# EAGLE board rtu (EAGLE 9.3.0)
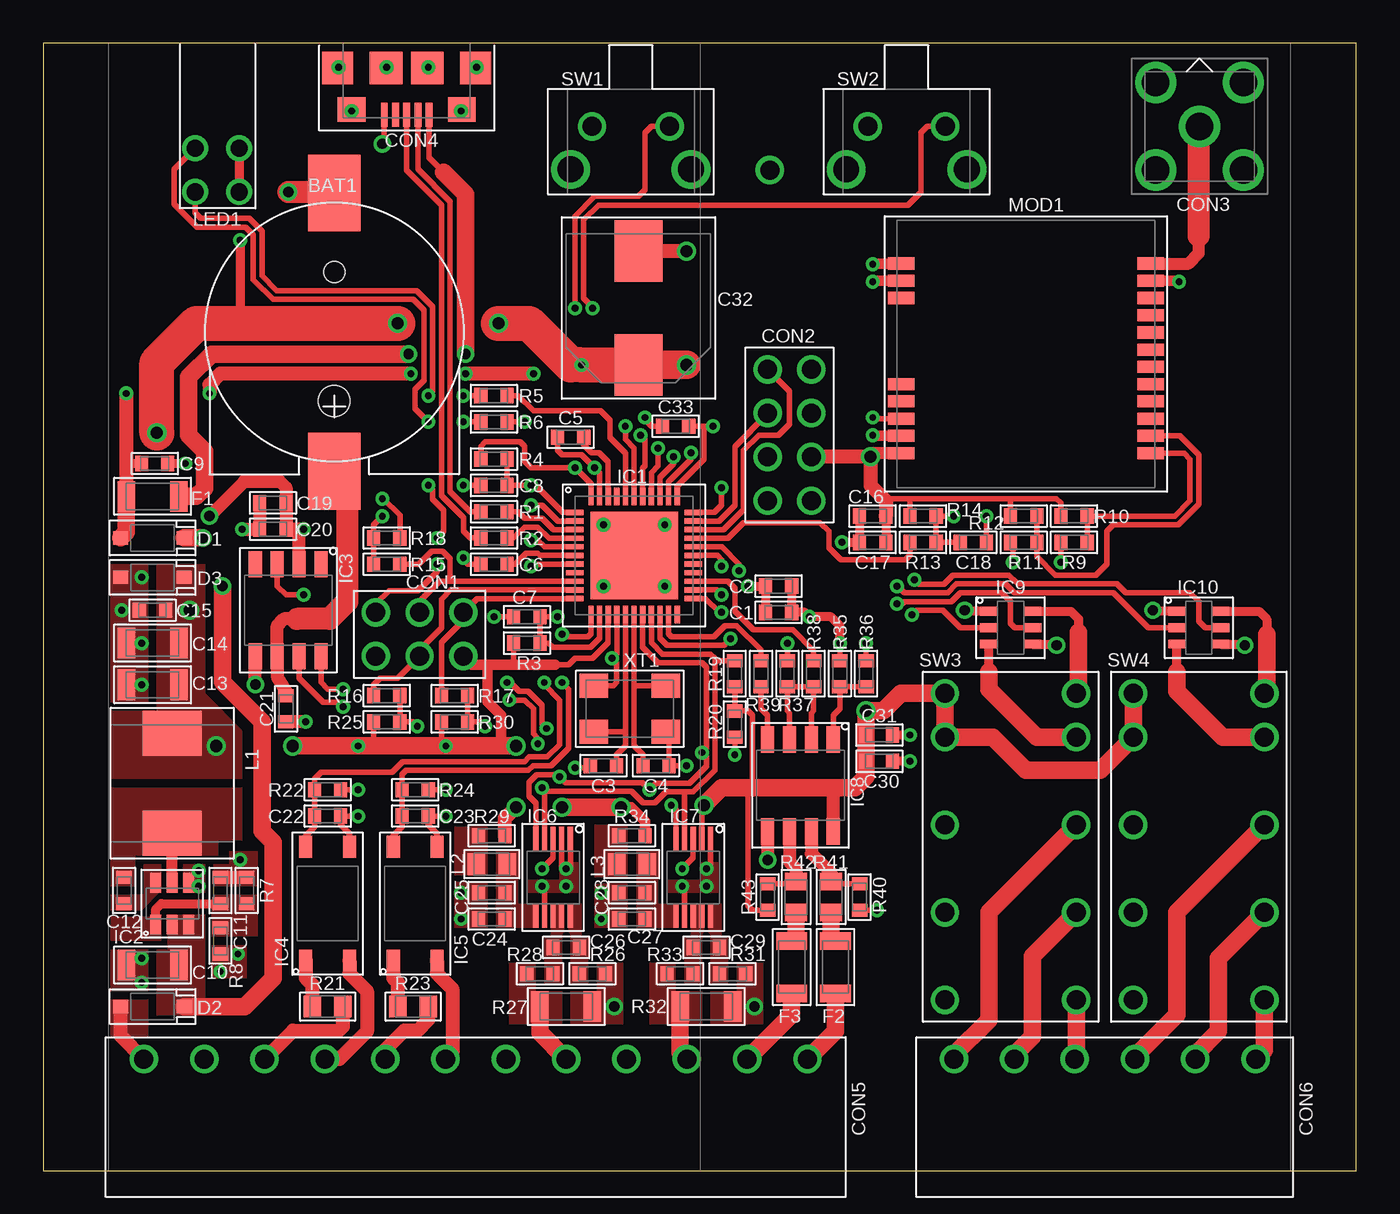
[diagram p0: board, top side]
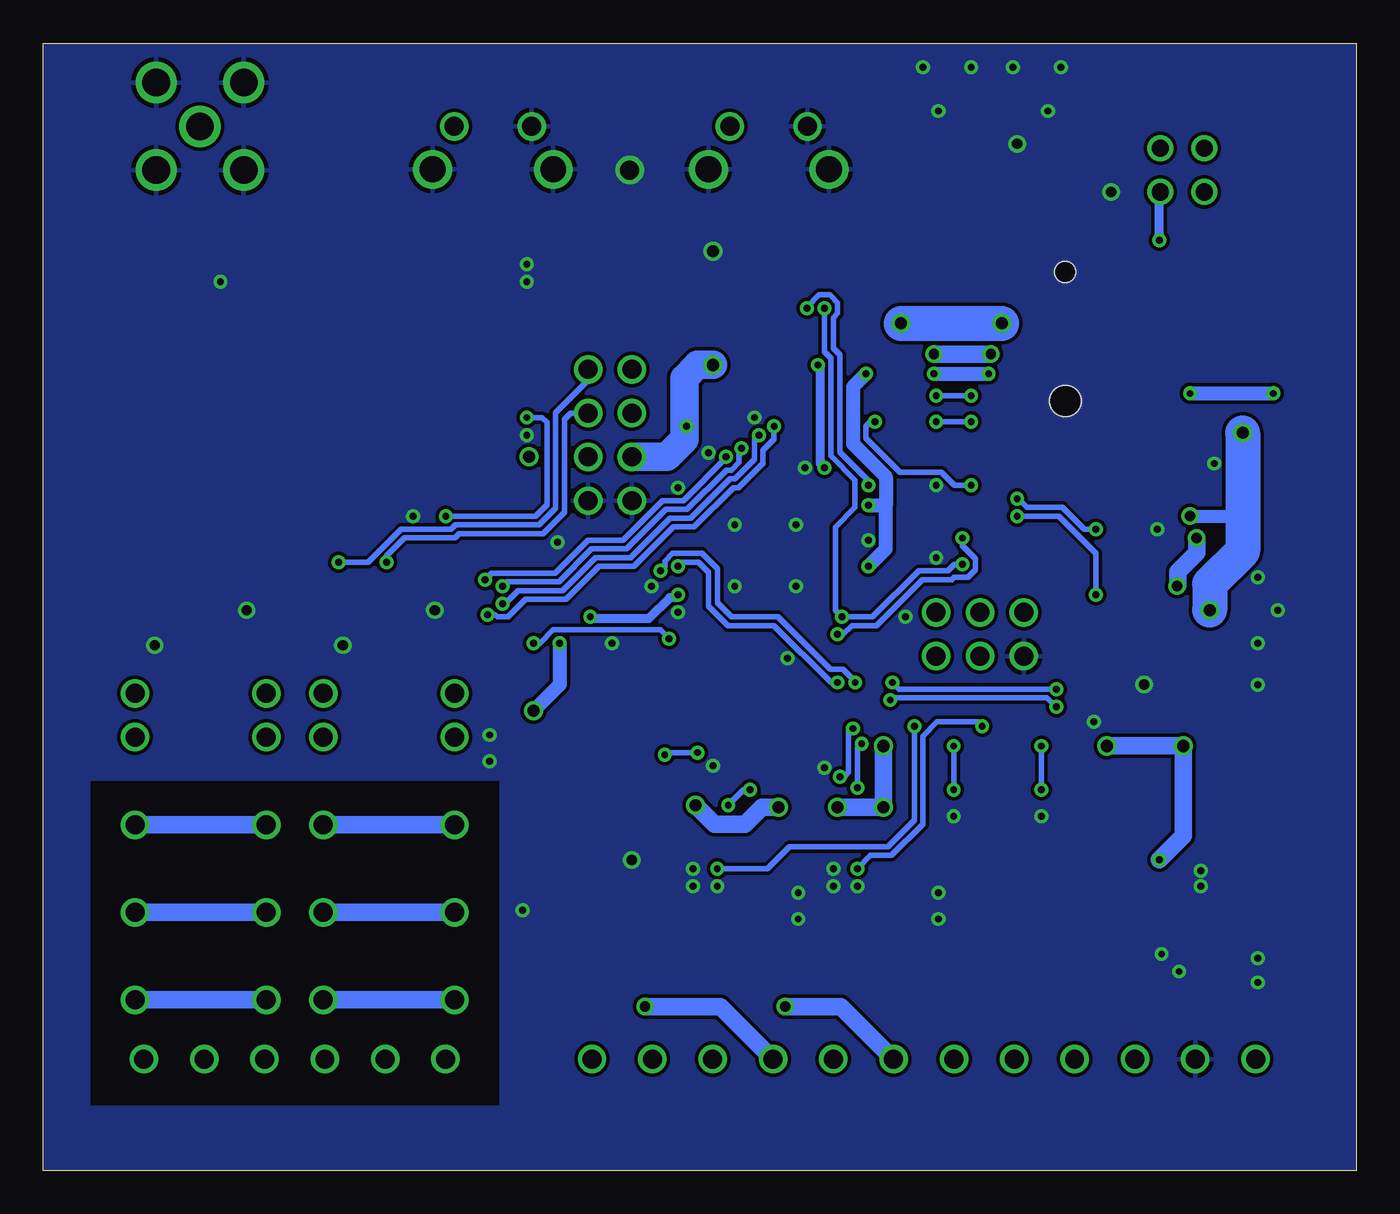
[diagram p1: board, bottom side, seen from below]

Size 76.2 x 65.41 mm. Coordinates in mm from the lower left corner, seen from the top.
Outline: 0,0 76.2,0 76.2,65.41 0,65.41 0,0
Copper layers (1*16): Top 0.035mm / dielectric 1.5mm / Bottom 0.035mm
Design rules "myparts *": minimum track width 12mil, minimum drill 0.4mm, track to track 8mil, track to pad 8mil, pad to pad 8mil, via to via 8mil, smd to smd 0mil, copper to edge 0mil, drill to drill 6mil, minimum pad ring 10mil, minimum via ring 8mil, stop-mask expansion 4mil, vias tented up to drill 28mil, thermal gap 10mil
Holes 1.8 mm at 16.89,44.64
Holes 1.2 mm at 16.89,52.13

## Footprints (pad centres in the part's own frame; a part is rotated, then mirrored left to right if it is on the bottom)
BAT-1220-BC501SM = smd 4.445 x 3.048: + 8.065,0; - -8.065,0
0603 = smd 0.762 x 0.889: 1 -0.762,0; 2 0.762,0
1206 = smd 1.016 x 1.778: 1 -1.524,0; 2 1.524,0
CAPACITOR-SMD-8 = smd 2.794 x 3.556: 1 0,3.302; 2 0,-3.302
ISP = drill 1.1 pad 1.65: 1 0,0; 2 2.54,0; 3 0,-2.54; 4 2.54,-2.54; 5 0,-5.08; 6 2.54,-5.08
HEADER-8P-2R-DIP-2_54MM = drill 1.1 pad 1.65: 1 0,0; 2 2.54,0; 3 5.08,0; 4 7.62,0; 5 0,2.54; 6 2.54,2.54; 7 5.08,2.54; 8 7.62,2.54
SMA-RF = drill 1.6: 1 0,0; 2 -2.54,2.54; 3 -2.54,-2.54; 4 2.54,-2.54; 5 2.54,2.54
USB-MICRO-B-SMD = smd 0.4 x 1.4: 1 -1.3,4.15; 2 -0.65,4.15; 3 0,4.15; 4 0.65,4.15; 5 1.3,4.15 | smd 1.6 x 1.4: 6 -3.2,3.85; 7 3.2,3.85 | smd 1.8 x 1.9: 8 -4,1.45; 11 4,1.45 | smd 1.9 x 1.9: 9 -1.2,1.45; 10 1.2,1.45
KF2EDGR-3.5-12P = drill 1.1: 1 19.25,0; 2 15.75,0; 3 12.25,0; 4 8.75,0; 5 5.25,0; 6 1.75,0; 7 -1.75,0; 8 -5.25,0; 9 -8.75,0; 10 -12.25,0; 11 -15.75,0; 12 -19.25,0
KF2EDGR-3.5-6P = drill 1.1: 1 8.75,0; 2 5.25,0; 3 1.75,0; 4 -1.75,0; 5 -5.25,0; 6 -8.75,0
SOD123-DIODE = smd 0.889 x 0.762: 1 -1.841,0; 2 1.841,0
QFN-44 = smd 1.016 x 0.305: 1 -3.429,2.5; 2 -3.429,2; 3 -3.429,1.5; 4 -3.429,1; 5 -3.429,0.5; 6 -3.429,0; 7 -3.429,-0.5; 8 -3.429,-1; 9 -3.429,-1.5; 10 -3.429,-2; 11 -3.429,-2.5; 23 3.429,-2.5; 24 3.429,-2; 25 3.429,-1.5; 26 3.429,-1; 27 3.429,-0.5; 28 3.429,0; 29 3.429,0.5; 30 3.429,1; 31 3.429,1.5; 32 3.429,2; 33 3.429,2.5 | smd 0.305 x 1.016: 12 -2.5,-3.429; 13 -2,-3.429; 14 -1.5,-3.429; 15 -1,-3.429; 16 -0.5,-3.429; 17 0,-3.429; 18 0.5,-3.429; 19 1,-3.429; 20 1.5,-3.429; 21 2,-3.429; 22 2.5,-3.429; 34 2.5,3.429; 35 2,3.429; 36 1.5,3.429; 37 1,3.429; 38 0.5,3.429; 39 0,3.429; 40 -0.5,3.429; 41 -1,3.429; 42 -1.5,3.429; 43 -2,3.429; 44 -2.5,3.429 | smd 5.08 x 5.08: 45 0,0
SOT23-6 = smd 1.143 x 0.635: 1 -1.206,0.95; 2 -1.206,0; 3 -1.206,-0.95; 4 1.206,-0.95; 5 1.206,0; 6 1.206,0.95
SOIC-8 = smd 1.524 x 0.762: 1 -2.667,1.905; 2 -2.667,0.635; 3 -2.667,-0.635; 4 -2.667,-1.905; 5 2.667,-1.905; 6 2.667,-0.635; 7 2.667,0.635; 8 2.667,1.905
OPTO-SMD = smd 1.27 x 0.762: 1 -3.3,1.27; 2 -3.3,-1.27; 3 3.3,-1.27; 4 3.3,1.27
VSSOP-10 = smd 1.397 x 0.3: 1 -2.223,1; 2 -2.223,0.5; 3 -2.223,0; 4 -2.223,-0.5; 5 -2.223,-1; 6 2.223,-1; 7 2.223,-0.5; 8 2.223,0; 9 2.223,0.5; 10 2.223,1
SC74-6 = smd 1.016 x 0.508: 1 -1.27,0.95; 2 -1.27,0; 3 -1.27,-0.95; 4 1.27,-0.95; 5 1.27,0; 6 1.27,0.95
INDUCTOR-0520-0630 = smd 2.6 x 3.4: 1 -2.9,0; 2 2.9,0
0805 = smd 1.016 x 1.27: 1 -0.889,0; 2 0.889,0
LED-HOLDER-2P = drill 1: 1 1.27,6.096; 2 -1.27,6.096; 3 1.27,8.636; 4 -1.27,8.636
RAK4200 = smd 1.524 x 0.7: 1 -7.239,5.75; 2 -7.239,4.75; 3 -7.239,3.75; 4 -7.239,2.75; 5 -7.239,1.75; 6 -7.239,0.75; 7 -7.239,-0.25; 8 -7.239,-1.25; 9 -7.239,-2.25; 10 -7.239,-3.25; 11 -7.239,-4.25; 12 -7.239,-5.25; 13 7.239,-5.25; 14 7.239,-4.25; 15 7.239,-3.25; 16 7.239,1.75; 17 7.239,2.75; 18 7.239,3.75; 19 7.239,4.75; 20 7.239,5.75
B3F-3150-52-55 = drill 1.1: 1 -2.25,0; 2 2.25,0 | drill 1.5: 3 -3.5,2.5; 4 3.5,2.5
HFD2-L2 = drill 1.1: C1 -3.81,1.27; C2 3.81,1.27; L1+ -3.81,8.89; L1- 3.81,8.89; L2+ -3.81,6.35; L2- 3.81,6.35; NC1 -3.81,-3.81; NC2 3.81,-3.81; NO1 -3.81,-8.89; NO2 3.81,-8.89
CRYSTAL-5032-4P = smd 1.651 x 1.397: 1 -2.095,-1.333; 2 2.095,-1.333; 3 2.095,1.333; 4 -2.095,1.333

## Placement (x,y rotation side)
BAT1  [BAT-1220-BC501SM]  16.89,48.64 270 top
C1  [0603]  42.67,32.38 0 top
C2  [0603]  42.67,33.91 0 top
C3  [0603]  32.51,23.5 0 top
C4  [0603]  35.56,23.5 180 top
C5  [0603]  30.61,42.55 0 top
C6  [0603]  26.16,35.18 0 top
C7  [0603]  28.07,32.13 0 top
C8  [0603]  26.16,39.75 180 top
C9  [0603]  6.48,41.02 180 top
C10  [1206]  6.35,11.94 0 top
C11  [0603]  10.29,16.26 90 top
C12  [0603]  4.7,16.26 270 top
C13  [1206]  6.35,28.19 0 top
C14  [1206]  6.35,30.61 0 top
C15  [0603]  6.35,32.51 0 top
C16  [0603]  48.13,37.97 0 top
C17  [0603]  48.13,36.45 0 top
C18  [0603]  53.98,36.45 180 top
C19  [0603]  13.34,38.73 0 top
C20  [0603]  13.34,37.21 0 top
C21  [0603]  14.1,26.8 90 top
C22  [0603]  16.51,20.57 180 top
C23  [0603]  21.59,20.57 180 top
C24  [0603]  26.04,14.61 0 top
C25  [0603]  26.04,16.13 0 top
C26  [0603]  30.35,12.95 0 top
C27  [0603]  34.16,14.61 0 top
C28  [0603]  34.16,16.13 0 top
C29  [0603]  38.48,12.95 0 top
C30  [0603]  48.51,23.75 180 top
C31  [0603]  48.51,25.27 180 top
C32  [CAPACITOR-SMD-8]  34.54,50.04 0 top
C33  [0603]  36.7,43.18 0 top
CON1  [ISP]  24.38,32.38 270 top
CON2  [HEADER-8P-2R-DIP-2_54MM]  42.04,46.48 270 top
CON3  [SMA-RF]  67.1,60.58 0 top
CON4  [USB-MICRO-B-SMD]  21.1,65.41 180 top
CON5  [KF2EDGR-3.5-12P]  25.1,6.48 0 top
CON6  [KF2EDGR-3.5-6P]  61.6,6.48 0 top
D1  [SOD123-DIODE]  6.35,36.7 180 top
D2  [SOD123-DIODE]  6.35,9.53 180 top
D3  [SOD123-DIODE]  6.35,34.42 180 top
F1  [1206]  6.35,39.12 180 top
F2  [1206]  45.97,11.81 90 top
F3  [1206]  43.43,11.81 90 top
IC1  [QFN-44]  34.29,35.69 0 top
IC2  [SOT23-6]  7.49,15.49 90 top
IC3  [SOIC-8]  14.22,32.51 270 top
IC4  [OPTO-SMD]  16.51,15.49 90 top
IC5  [OPTO-SMD]  21.59,15.49 90 top
IC6  [VSSOP-10]  29.59,17.02 270 top
IC7  [VSSOP-10]  37.72,17.02 270 top
IC8  [SOIC-8]  43.94,22.35 270 top
IC9  [SC74-6]  56.13,31.5 0 top
IC10  [SC74-6]  67.06,31.5 0 top
L1  [INDUCTOR-0520-0630]  7.49,22.48 270 top
L2  [0805]  26.04,17.78 0 top
L3  [0805]  34.16,17.78 0 top
LED1  [LED-HOLDER-2P]  10.1,65.41 180 top
MOD1  [RAK4200]  57.02,47.37 180 top
R1  [0603]  26.16,38.23 0 top
R2  [0603]  26.16,36.7 0 top
R3  [0603]  28.07,30.61 0 top
R4  [0603]  26.16,41.27 180 top
R5  [0603]  26.16,44.96 180 top
R6  [0603]  26.16,43.43 180 top
R7  [0603]  11.81,16.26 270 top
R8  [0603]  10.29,13.34 90 top
R9  [0603]  59.82,36.45 0 top
R10  [0603]  59.82,37.97 180 top
R11  [0603]  56.9,36.45 0 top
R12  [0603]  56.9,37.97 180 top
R13  [0603]  51.05,36.45 180 top
R14  [0603]  51.05,37.97 180 top
R15  [0603]  19.94,35.18 0 top
R16  [0603]  19.94,27.56 180 top
R17  [0603]  23.88,27.56 180 top
R18  [0603]  19.94,36.7 180 top
R19  [0603]  40.13,28.83 90 top
R20  [0603]  40.13,25.91 270 top
R21  [0805]  16.51,9.53 180 top
R22  [0603]  16.51,22.1 180 top
R23  [0805]  21.46,9.53 180 top
R24  [0603]  21.59,22.1 180 top
R25  [0603]  19.94,26.04 0 top
R26  [0603]  31.88,11.43 0 top
R27  [1206]  30.35,9.53 0 top
R28  [0603]  28.83,11.43 180 top
R29  [0603]  26.04,19.43 180 top
R30  [0603]  23.88,26.04 0 top
R31  [0603]  40.01,11.43 180 top
R32  [1206]  38.48,9.53 180 top
R33  [0603]  36.96,11.43 0 top
R34  [0603]  34.16,19.43 180 top
R35  [0603]  46.23,28.83 270 top
R36  [0603]  47.75,28.83 270 top
R37  [0603]  43.18,28.83 270 top
R38  [0603]  44.7,28.83 270 top
R39  [0603]  41.66,28.83 270 top
R40  [0603]  47.37,15.88 90 top
R41  [0805]  45.72,15.88 90 top
R42  [0805]  43.69,15.88 90 top
R43  [0603]  42.04,15.88 90 top
SW1  [B3F-3150-52-55]  34.1,60.58 180 top
SW2  [B3F-3150-52-55]  50.1,60.58 180 top
SW3  [HFD2-L2]  56.13,18.8 0 top
SW4  [HFD2-L2]  67.06,18.8 0 top
XT1  [CRYSTAL-5032-4P]  34.04,26.8 0 top

## Library data of the parts
BAT1 C1-C33 CON1-CON6 D1-D3 F1-F3 IC1-IC10 L1-L3 LED1 MOD1 R1-R43 SW1-SW4 XT1 = myparts

## Nets
GND: BAT1.- C1.1 C2.1 C3.1 C4.1 C5.1 C6.1 C7.1 C8.2 C9.1 C10.1 C13.1 C14.1 C15.1 C16.1 C17.1 C18.1 C19.1 C20.1 C21.1 C22.1 C23.1 C24.1 C25.1 C27.1 C28.1 C30.1 C31.1 C32.1 C33.1 CON1.6 CON2.4 CON2.8 CON3.2 CON3.3 CON3.4 CON3.5 CON4.5 CON4.6 CON4.7 CON4.8 CON4.9 CON4.10 CON4.11 CON5.11 D3.2 IC1.5 IC1.15 IC1.23 IC1.33 IC1.35 IC1.43 IC1.45 IC2.4 IC3.5 IC4.3 IC5.3 IC6.1 IC6.2 IC6.7 IC7.1 IC7.7 IC8.5 IC9.1 IC9.4 IC10.1 IC10.4 MOD1.11 MOD1.13 MOD1.14 MOD1.19 R8.1 R37.1 R40.1 SW1.2 SW1.3 SW1.4 SW2.2 SW2.3 SW2.4 XT1.2 XT1.4
N$1: IC1.40 R5.1
N$2: C18.2 MOD1.18 R13.1 R14.1
N$3: CON1.1 IC1.11 R17.2
N$4: CON3.1 MOD1.12
N$5: CON2.2 IC1.32
N$6: MOD1.1 R9.2 R10.1
N$7: MOD1.2 R11.2 R12.1
N$8: LED1.1 R6.2
N$9: CON1.4 IC1.10 R16.2
N$10: C3.2 IC1.16 XT1.1
N$11: CON2.1 IC1.31
N$12: C4.2 IC1.17 XT1.3
N$13: C16.2 C17.2 CON2.7 MOD1.20 R10.2 R12.2 R14.2
N$14: CON2.5 R9.1
N$15: LED1.3 R5.2
N$16: CON2.6 R11.1
N$17: C29.1 IC7.8 IC7.9 R33.2
N$18: CON4.2 R1.1
N$19: CON4.3 R2.1
N$20: IC4.1 R21.2
N$21: C29.2 IC7.10 R31.2
N$22: IC1.30 R13.2
N$23: IC6.3 R16.1 R25.2
N$24: IC1.36 IC10.5
N$25: IC7.3 R17.1 R30.2
N$26: IC9.6 SW3.L1-
N$27: L3.1 R34.2
N$28: IC9.3 SW3.L2-
N$29: C8.1 IC1.1 R4.1 SW2.1
N$30: CON5.4 R31.1 R32.1
N$31: C5.2 IC1.42
N$32: C23.2 IC1.28 IC5.4 R24.2
N$33: IC5.1 R23.2
N$34: C6.2 IC1.6
N$35: C22.2 IC1.29 IC4.4 R22.2
N$36: IC1.12 R6.1
N$38: IC1.37 IC10.2
N$39: CON6.1 SW4.NO1 SW4.NO2
N$40: CON5.3 R32.2 R33.1
N$41: C7.2 CON1.5 IC1.13 R3.2 SW1.1
N$42: C27.2 C28.2 IC7.6 L3.2
N$43: IC1.3 R1.2
N$44: IC1.4 R2.2
N$45: CON1.3 IC1.9 R15.2
N$46: CON5.2 F3.1
N$47: IC8.1 R35.2 R36.2
N$48: IC8.4 R39.2
N$49: CON5.7 IC5.2
N$50: CON5.9 IC4.2
N$51: IC8.7 R40.2 R41.2
N$52: IC8.6 R42.2 R43.2
N$53: IC8.2 IC8.3 R37.2 R38.2
N$54: F3.2 R42.1
N$55: CON5.8 R23.1
N$56: CON4.1 F1.1
N$57: C10.2 D1.1 D2.1 IC2.2 IC2.3
N$58: BAT1.+ C21.2 IC3.6
N$59: CON5.6 R26.2 R27.2
N$60: CON5.1 F2.1
N$61: IC1.20 R36.1
N$62: IC1.21 R39.1
N$63: IC1.25 R38.1
N$64: IC10.6 SW4.L1-
N$65: C12.2 IC2.6
N$66: C12.1 IC2.5 L1.2
N$67: CON6.2 SW4.NC1 SW4.NC2
N$68: C26.2 IC6.10 R26.1
N$69: C26.1 IC6.8 IC6.9 R28.1
N$70: IC3.3 R15.1 R18.2
N$71: L2.1 R29.2
N$72: C11.1 IC2.1 R7.2 R8.2
N$73: IC1.18 IC3.8 IC6.5 IC7.5 R20.2
N$74: CON6.3 SW4.C1 SW4.C2
N$77: C24.2 C25.2 IC6.6 L2.2
N$79: IC1.19 IC3.7 IC6.4 IC7.4 R19.2
N$80: F2.2 R41.1
N$81: CON5.5 R27.1 R28.2
N$82: IC10.3 SW4.L2-
N$85: CON5.10 R21.1
N$86: CON6.4 SW3.NO1 SW3.NO2
N$87: CON6.5 SW3.NC1 SW3.NC2
N$88: CON6.6 SW3.C1 SW3.C2
N$90: IC1.38 IC9.5
N$91: IC1.39 IC9.2
UVCC: C9.2 D1.2 F1.2 IC1.2 IC1.7
VCC: C1.2 C2.2 C11.2 C13.2 C14.2 C15.2 C19.2 C20.2 C30.2 C31.2 C32.2 C33.2 CON1.2 CON2.3 D3.1 IC1.14 IC1.24 IC1.34 IC1.44 IC3.2 IC7.2 IC8.8 L1.1 LED1.2 LED1.4 R3.1 R4.2 R7.1 R18.1 R19.1 R20.1 R22.1 R24.1 R25.1 R29.1 R30.1 R34.1 R35.1 R43.1 SW3.L1+ SW3.L2+ SW4.L1+ SW4.L2+
VEXT: CON5.12 D2.2

## Tracks (layer width: path | path; a pad name or v marks a point on that pad's centre or on a via)
GND  (via drill 0.4, 0.6, 0.7, 1.1)
  Top 0.305: C3.1 31.62,23.37 v30.86,23.37 | v37.34,23.5 C4.1 36.32,25.27 XT1.2 | v43.18,30.61 R37.1 | IC1.23 38.44,33.19 39.24,32.38 v39.37,32.38 | IC1.15 33.29,29.99 v33.02,29.72 33.28,29.46 33.28,28.33 33.08,28.13 XT1.4 | v26.16,32.13 C7.1 | IC1.33 38.95,38.19 39.37,38.61 v39.37,39.62 | IC1.5 29.09,36.19 28.7,36.58 v28.32,36.58 | C6.1 24.64,35.18 24.38,35.43 v24.38,35.56 | IC1.43 32.29,40.48 v32,40.77 31.25,41.53 30.1,41.53 29.84,41.78 C5.1 | v24.38,39.75 C8.2 | CON4.5 19.8,59.68 v19.68,59.56 | C18.1 v54.74,37.97 | v48.39,15.11 R40.1 | v17.14,64.01 v17.14,64 CON4.11 | v19.94,64.01 19.9,63.97 CON4.10 | v22.35,64.01 CON4.9 | v25.15,64.01 25.1,63.96 CON4.8 | v17.91,61.47 v17.9,61.48 CON4.7 | v24.26,61.47 24.3,61.51 CON4.6 | IC6.7 29.09,16.51 v28.96,16.51 | IC6.2 30.09,17.53 v30.35,17.53 30.59,17.53 IC6.1 | IC7.7 37.22,16.38 v37.08,16.51 | IC7.1 38.72,17.76 v38.48,17.53 | v18.29,20.57 C22.1 17.27,20.07 17.78,19.56 IC4.3 | IC5.3 22.86,19.56 22.35,20.07 C23.1 v23.37,20.57 | C33.1 35.31,43.18 34.92,43.56 v34.92,43.69 | IC1.45 32.51,35.69 v32.51,37.47 | IC1.45 34.29,37.47 v36.07,37.47 | IC1.45 36.07,35.69 v36.07,33.91 | IC1.45 34.29,33.91 v32.51,33.91 | IC1.35 36.29,39.97 37.59,41.27 v37.59,41.66
  Top 0.508: C16.1 C17.1 v46.35,36.45 | C1.1 C2.1 v40.89,33.91 | v50.29,25.27 C31.1 | v8.26,41.02 C9.1 | v50.29,23.75 C30.1 | IC9.1 53.53,32.45 v53.47,32.51 | IC9.4 58.73,30.55 v58.8,30.48 | IC10.1 64.45,32.45 v64.39,32.51 | IC10.4 69.66,30.55 v69.72,30.48
  Top 0.61: MOD1.13 48.18,52.62 v48.13,52.58 | MOD1.14 48.19,51.62 v48.13,51.56 | MOD1.19 48.18,42.62 v48.13,42.67 | MOD1.11 65.85,51.62 v65.91,51.56
  Top 0.762: IC8.5 v42.04,18.03 | C19.1 C20.1 v11.56,37.21 | v15.24,26.04 C21.1 | v12.32,28.19 IC3.5
  Top 0.813: v37.34,53.34 C32.1
  Top 1.27: BAT1.- 16.83,56.77 v14.22,56.77
  other vias: 5.71,34.42 4.57,32.51 5.71,30.61 5.71,28.19 9.02,17.4 9.02,16.51 11.3,12.57 5.71,12.32 5.71,10.92 24.26,16.13 24.26,14.61 32.38,16.13 32.38,14.61 30.35,16.51 38.48,16.51 10.29,11.56 42.16,58.04
  pour Bottom: 0.13,0.13 0.13,65.28 76.07,65.28 76.07,0.13
  pour Top (no thermals): 3.94,27.18 6.1,27.18 6.1,35.18 3.94,35.18
  pour Top (no thermals): 8.13,16.13 8.13,17.78 9.4,17.78 9.4,16.13
  pour Top (no thermals): 3.94,12.83 6.1,12.83 6.1,10.41 3.94,10.41
  pour Top (no thermals): 23.88,16.76 25.78,16.76 25.78,14.1 23.88,14.1
  pour Top (no thermals): 32,16.64 33.91,16.64 33.91,14.1 32,14.1
  pour Top (no thermals): 9.78,13.08 11.81,13.08 11.81,11.18 9.78,11.18
  pour Top (no thermals): 28.07,16.13 31.11,16.13 31.11,17.91 29.97,17.91 29.97,16.89 28.07,16.89
  pour Top (no thermals): 36.2,16.13 39.24,16.13 39.24,17.91 38.1,17.91 38.1,17.78 38.1,16.89 36.2,16.89
GNDX
  cutout Bottom: 49.78,3.81 73.41,3.81 73.41,22.61 49.78,22.61
N$1
  Top 0.305: R5.1 27.56,44.96 28.45,44.07 32.34,44.07 32.89,43.52 32.89,42.5 33.79,41.6 IC1.40
N$2  (via drill 0.4)
  Top 0.305: MOD1.18 48.2,43.62 v48.13,43.69 | C18.2 R13.1 R14.1 v52.83,37.97
  Bottom 0.305: v48.13,43.69 47.24,43.69 46.97,43.41 46.97,38.63 47.62,37.97 v52.83,37.97
N$3
  Top 0.305: IC1.11 25.19,33.19 CON1.1 24.38,31.92 23.11,30.65 R17.2
N$4
  Top 0.686: MOD1.12 66.46,52.62 67.06,53.21 67.06,54.23
  Top 1.27: 67.06,54.23 67.06,60.28 CON3.1
N$5
  Top 0.305: IC1.32 39.21,37.69 40.13,38.61 40.13,41.99 42.04,43.9 CON2.2
N$6
  Top 0.305: R9.2 R10.1 65.66,37.97 66.55,38.86 66.55,41.27 66.2,41.62 MOD1.1
N$7
  Top 0.305: R12.1 R11.2 57.66,35.63 58.74,34.55 58.8,34.55 58.8,34.54 61.09,34.54 61.72,35.18 61.72,37.08 62.1,37.47 65.87,37.47 67.06,38.65 67.06,41.53 65.96,42.62 MOD1.2
N$8  (via drill 0.4)
  Top 0.305: LED1.1 7.62,58.1 7.62,56.05 8.94,54.73 11.74,54.73 12.19,54.29 12.19,51.69 13.34,50.55 21.46,50.55 22.1,49.91 22.1,45.85 21.59,45.34 21.59,44.19 v22.35,43.43 | v24.38,43.43 R6.2
  Bottom 0.305: v22.35,43.43 v24.38,43.43
N$9
  Top 0.305: IC1.10 23.65,33.69 23.11,33.15 23.11,31.5 21.84,30.23 CON1.4 20.57,28.57 19.56,28.57 19.18,28.19 R16.2
N$10
  Top 0.305: IC1.16 33.79,25.46 | 33.79,25.46 XT1.1 | 33.79,25.46 33.79,24.65 33.27,24.13 C3.2
N$11
  Top 0.305: IC1.31 39.47,37.19 40.64,38.35 40.64,41.78 41.53,42.67 42.67,42.67 43.31,43.31 43.31,45.21 CON2.1
N$12
  Top 0.305: IC1.17 34.29,28.13 | 34.29,28.13 XT1.3 | 34.29,28.13 34.29,24.64 34.8,24.13 C4.2
N$13  (via drill 0.7)
  Top 0.305: R10.2 59.05,38.73 58.8,38.99 56.13,38.99 | R12.2 56.13,38.99 | 56.13,38.99 50.29,38.99 | R14.2 50.29,38.99 | 50.29,38.99 48.77,38.99 48.7,39.05
  Top 0.508: C16.2 C17.2
  Top 0.686: MOD1.20 48.23,41.62 v48.01,41.4
  Top 0.813: CON2.7 v48.01,41.4 48.01,39.75 48.7,39.05 48.9,38.86 C16.2
N$14  (via drill 0.4)
  Top 0.305: R9.1 v59.05,35.31
  Bottom 0.305: CON2.5 44.58,45.85 46.46,43.96 46.46,38.42 47.41,37.47 52.27,37.47 52.52,37.21 55.43,37.21 57.33,35.31 v59.05,35.31
N$15  (via drill 0.4)
  Top 0.305: LED1.3 8.83,55.56 9.15,55.24 11.96,55.24 12.7,54.5 12.7,51.9 13.54,51.05 21.67,51.05 22.61,50.12 22.61,45.21 v22.35,44.96 | v24.38,44.96 R5.2
  Bottom 0.305: v22.35,44.96 v24.38,44.96
N$16  (via drill 0.4)
  Top 0.305: R11.1 56.26,36.32 v56.26,35.31
  Bottom 0.305: CON2.6 45.59,43.94 45.95,43.58 45.95,38.21 47.2,36.96 52.06,36.96 52.31,36.71 55.22,36.71 56.26,35.66 v56.26,35.31
N$17
  pour Top (no thermals): 37.21,13.59 37.59,13.59 37.59,15.49 38.35,15.49 38.35,13.84 38.23,13.72 38.23,10.79 37.21,10.79
N$18
  Top 0.305: R1.1 24.77,38.23 23.62,39.37 23.62,56.22 21.75,58.09 CON4.2
N$19
  Top 0.305: R2.1 24.77,36.7 24.38,37.08 24.38,37.89 23.11,39.16 23.11,56.01 21.1,58.02 CON4.3
N$20
  Top 0.813: IC4.1 15.24,11.18 15.62,10.79 R21.2
N$21
  pour Top (no thermals): 38.61,15.49 38.61,13.84 38.73,13.72 38.73,10.79 39.75,10.79 39.75,13.59 39.37,13.59 39.37,15.49
N$22
  Top 0.305: R13.2 50.29,35.69 50.04,35.43 46.3,35.43 45.59,36.14 45.59,37.08 45.09,37.59 40.64,37.59 39.73,36.69 IC1.30
N$23  (via drill 0.4)
  Top 0.305: IC6.3 29.59,18.16 v28.96,17.53 | R16.1 R25.2 21.46,26.04 v21.72,25.78
  Bottom 0.305: v28.96,17.53 28.19,18.29 26.97,18.29 25.15,20.11 25.15,25.22 24.33,26.04 21.97,26.04 v21.72,25.78
N$24  (via drill 0.4)
  Top 0.305: IC1.36 35.79,40.23 36.58,41.02 v36.58,41.4 | v50.55,34.29 50.8,34.03 52.28,34.03 52.79,34.54 56.05,34.54 56.55,34.04 62.31,34.04 62.82,33.53 66.55,33.53 67.06,33.02 67.06,31.88 67.44,31.5 IC10.5
  Bottom 0.305: v36.58,41.4 36.58,41.34 39.06,38.87 40.26,38.87 42.55,36.58 44.58,36.58 46.48,34.67 50.17,34.67 v50.55,34.29
N$25  (via drill 0.4)
  Top 0.305: IC7.3 37.72,18.16 v37.08,17.53 | R17.1 R30.2 25.4,26.04 v25.65,25.78
  Bottom 0.305: v37.08,17.53 34.16,17.53 32.89,18.8 27.18,18.8 25.65,20.32 v25.65,25.78
N$26
  Top 0.508: 60.07,31.24 60.07,32 59.63,32.45 IC9.6
  Top 1.016: SW3.L1- 60.07,27.81 60.07,31.24
N$27
  pour Top (no thermals): 33.91,20.07 32,20.07 32,17.02 33.91,17.02
N$28
  Top 0.508: 54.86,28.96 IC9.3
  Top 1.016: SW3.L2- 57.66,25.15 54.86,27.94 54.86,28.96
N$29  (via drill 0.4)
  Top 0.305: IC1.1 30.14,38.19 28.57,39.75 v28.32,39.75 C8.1 R4.1 | v31.88,50.04 31.88,50.09 31.37,50.6 31.37,55.16 32.21,56.01 50.16,56.01 50.93,56.77 50.93,60.2 51.31,60.58 SW2.1
  Bottom 0.305: v31.88,50.04 31.88,50.09 31.18,50.8 30.55,50.8 30.1,50.35 30.1,49.72 30.35,49.47 30.35,47.71 29.98,47.33 29.98,41.67 28.32,40.02 v28.32,39.75
N$30  (via drill 0.6)
  Bottom 1.016: v41.27,9.53 36.9,9.53 CON5.4
  pour Top (no thermals): 40.26,12.06 41.78,12.06 41.78,8.51 38.73,8.51 38.73,10.41 40.26,10.41
N$31
  Top 0.305: C5.2 31.37,42.12 31.83,41.66 32.26,41.66 32.79,41.12 IC1.42
N$32  (via drill 0.4)
  Top 0.305: IC5.4 20.32,19.43 20.83,19.94 C23.2 R24.2 20.83,22.99 21.06,23.22 28.15,23.22 28.42,23.49 29.46,23.49 30.48,24.51 30.48,27.94 v30.1,28.32 | IC1.28 39.12,35.69 39.37,35.43 v39.37,35.05
  Bottom 0.305: v30.1,28.32 30.48,28.32 33.78,31.62 36.46,31.62 37.59,32.75 37.59,34.71 38.18,35.3 39.12,35.3 v39.37,35.05
N$33
  Top 0.813: IC5.1 20.32,11.18 20.57,10.92 R23.2
N$34
  Top 0.305: IC1.6 28.83,35.69 28.7,35.81 28.01,35.81 27.38,35.18 C6.2
N$35  (via drill 0.4)
  Top 0.305: IC4.4 15.24,19.43 15.75,19.94 C22.2 R22.2 15.75,22.73 16.13,23.11 20.24,23.11 20.85,23.73 27.93,23.73 28.21,24 29.25,24 29.97,24.72 29.97,27.3 29.08,28.19 v29.08,28.32 | IC1.29 39.38,36.19 40.39,35.18 v40.39,34.8
  Bottom 0.305: v40.39,34.8 v40.38,34.8 40.13,35.05 40.13,35.37 39.68,35.81 37.97,35.81 37.08,34.92 37.08,32.96 36.25,32.13 33.57,32.13 30.52,29.08 29.79,29.08 29.08,28.38 v29.08,28.32
N$36  (via drill 0.4)
  Top 0.305: v27.94,43.43 R6.1 | IC1.12 31.79,31.16 31.62,30.99 30.23,30.99 v30.1,31.11 | v22.86,36.7 23.24,37.08 23.24,38.31 22.61,38.95 22.61,39.5 v22.35,39.75
  Bottom 0.305: v27.94,43.43 28.19,43.43 28.45,43.18 28.45,42.48 26.48,40.51 24.07,40.51 23.31,39.75 v22.35,39.75 | v30.1,31.11 29.79,31.11 29.28,31.62 27.86,31.62 25.19,34.29 23.48,34.29 23.35,34.42 22.55,34.42 22.1,34.87 22.1,35.49 22.86,36.25 v22.86,36.7
N$38  (via drill 0.4)
  Top 0.305: IC1.37 35.29,40.5 35.69,40.89 v35.69,41.91 | v49.53,33.91 49.59,33.91 49.97,33.52 52.49,33.52 53,34.04 55.84,34.04 56.34,33.53 62.1,33.53 64.14,31.5 IC10.2
  Bottom 0.305: v35.69,41.91 35.82,41.78 35.82,41.09 36.27,40.64 36.56,40.64 38.84,38.36 40.05,38.36 42.34,36.07 44.37,36.07 46.27,34.16 49.28,34.16 v49.53,33.91
N$39
  Top 1.016: SW4.NO2 70.87,6.99 CON6.1
  Bottom 1.016: SW4.NO1 SW4.NO2
N$40
  Top 1.016: R32.2 36.96,6.87 CON5.3
  pour Top (no thermals): 36.7,12.06 35.18,12.06 35.18,8.51 38.23,8.51 38.23,10.41 36.7,10.41
N$41  (via drill 0.4)
  Top 0.305: v30.86,50.04 30.86,55.37 32,56.52 34.54,56.52 34.92,56.9 34.92,60.2 35.31,60.58 SW1.1 | v29.84,32.13 C7.2 R3.2 29.34,30.61 29.59,30.35 31.75,30.35 32.29,30.89 IC1.13 | v22.86,35.18 22.86,34.75 21.76,33.66 20.07,33.66 19.3,32.89 CON1.5
  Bottom 0.305: v30.86,50.04 30.86,47.5 30.48,47.12 30.48,41.46 29.08,40.06 29.08,38.48 30.23,37.34 30.23,32.51 v29.84,32.13 28.07,32.13 25.4,34.8 23.69,34.8 23.31,35.18 v22.86,35.18
N$42
  pour Top (no thermals): 34.42,18.54 35.69,18.54 35.69,15.49 36.83,15.49 36.83,14.1 34.42,14.1
N$43
  Top 0.305: IC1.3 29.61,37.19 28.96,37.85 27.94,37.85 27.56,38.23 R1.2
N$44
  Top 0.305: IC1.4 29.35,36.69 28.7,37.34 27.94,37.34 27.3,36.7 R2.2
N$45
  Top 0.305: CON1.3 21.84,33.02 23.01,34.19 23.62,34.19 | 23.62,34.19 IC1.9 | 23.62,34.19 23.62,35.18 23.62,35.49 23.17,35.94 22.55,35.94 21.79,35.18 R15.2
N$46
  Top 1.016: F3.1 43.43,9.06 CON5.2
N$47
  Top 0.305: R36.2 R35.2 46.23,26.8 45.85,26.42 IC8.1
N$48
  Top 0.305: R39.2 41.66,26.8 42.04,26.42 IC8.4
N$49
  Top 0.813: IC5.2 22.86,11.43 23.75,10.54 23.75,6.88 CON5.7
N$50
  Top 0.813: IC4.2 17.78,11.43 18.8,10.41 18.8,8.09 17.18,6.48 CON5.9
N$51
  Top 0.305: R40.2 45.85,16.64 R41.2
  Top 0.762: IC8.7 44.58,18.41 45.72,17.27 R41.2
N$52
  Top 0.305: R43.2 43.56,16.64 R42.2
  Top 0.762: IC8.6 43.31,17.91 43.69,17.53 R42.2
N$53
  Top 0.305: IC8.3 43.31,26.54 43.18,26.67 R37.2 R38.2 44.7,26.67 44.58,26.54 IC8.2
N$54
  Top 1.016: R42.1 43.69,13.59 F3.2
N$55
  Top 0.813: R23.1 22.35,8.76 21.72,8.13 20.95,8.13 19.85,7.02 CON5.8
N$56  (via drill 0.6)
  Top 0.305: CON4.1 22.4,58.75 23.24,57.91
  Top 1.016: v21.21,47.37 9.78,47.37 8.46,46.05 8.46,42.65 9.37,41.74 9.37,39.59 8.89,39.12 F1.1 | v24.51,47.37 24.51,56.64 23.24,57.91
  Bottom 1.016: v24.51,47.37 v21.21,47.37
N$57  (via drill 0.6)
  Top 1.016: D2.1 11.68,9.53 13.34,11.18 13.34,19.05 12.7,19.68 12.7,26.04 10.41,28.32 v10.41,33.91 | D1.1 v9.27,36.7
  Bottom 1.016: v9.27,36.7 9.27,35.84 10.36,34.75 10.36,33.96 v10.41,33.91
  pour Top (no thermals): 7.24,14.86 9.4,14.86 9.4,12.83 7.24,12.83
  pour Top (no thermals): 9.4,12.83 6.6,12.83 6.6,9.02 9.4,9.02
N$58
  Top 0.762: C21.2 14.1,27.81 13.59,28.66 IC3.6 13.59,31.62 13.97,32 14.73,32 | 17.02,40.26 BAT1.+
  Top 1.27: 17.02,40.26 17.65,39.62 17.65,33.02 16.64,32 14.73,32
N$59  (via drill 0.6)
  Bottom 1.016: v33.15,9.53 29.9,9.53 CON5.6
  pour Top (no thermals): 32.13,12.06 33.66,12.06 33.66,8.51 30.61,8.51 30.61,10.41 32.13,10.41
N$60
  Top 1.016: F2.1 45.97,8.1 CON5.1
N$61  (via drill 0.4)
  Top 0.305: IC1.20 35.79,30.89 36.2,30.48 39.5,30.48 v39.88,30.86 | v47.75,30.61 R36.1
  Bottom 0.305: v39.88,30.86 40.39,31.37 46.61,31.37 47.37,30.61 v47.75,30.61
N$62
  Top 0.305: IC1.21 36.29,31.15 36.45,30.99 38.93,30.99 39.56,31.62 40.24,31.62 41.66,30.21 R39.1
N$63
  Top 0.305: IC1.25 39.73,34.19 40.13,33.78 40.13,32.45 41.22,31.37 43.49,31.37 44.7,30.16 R38.1
N$64
  Top 0.508: IC10.6 70.55,32.45 70.99,32 70.99,31.11
  Top 1.016: SW4.L1- 70.99,27.81 70.99,31.11
N$65
  pour Top (no thermals): 3.94,15.11 5.71,15.11 6.86,16.26 6.86,17.78 5.84,17.78 5.84,16 3.94,16
N$66
  Top 0.61: 7.49,18.67 7.49,18.8 L1.2
  Top 0.635: IC2.5 7.49,18.67
  pour Top (no thermals): 3.94,16.51 5.33,16.51 5.33,18.29 10.16,18.29 10.16,19.18 11.56,19.18 11.56,22.23 3.94,22.23
N$67
  Top 1.016: CON6.2 66.85,6.73 68.2,8.08 68.2,12.32 SW4.NC2
  Bottom 1.016: SW4.NC1 SW4.NC2
N$68
  pour Top (no thermals): 30.48,15.49 31.24,15.49 31.24,13.59 31.62,13.59 31.62,10.79 30.61,10.79 30.61,13.72 30.48,13.84
N$69
  pour Top (no thermals): 29.46,15.49 30.23,15.49 30.23,13.84 30.1,13.72 30.1,10.79 29.08,10.79 29.08,13.59 29.46,13.59
N$70  (via drill 0.4)
  Top 0.305: R15.1 R18.2 19.18,37.47 v19.68,37.97 | IC3.3 13.59,33.91 14.1,33.4 v15.11,33.4
  Bottom 0.305: v15.11,33.4 15.11,35.81 17.27,37.97 v19.68,37.97
N$71
  pour Top (no thermals): 23.88,17.14 25.78,17.14 25.78,19.94 23.88,19.94
N$72
  Top 0.508: IC2.1 6.54,15.18 6.86,15.49 C11.1
  pour Top (no thermals): 9.78,13.59 9.78,15.24 9.91,15.24 9.91,16 12.45,16 12.45,13.59
  pour Top (no thermals): 6.86,13.72 6.86,13.34 3.94,13.34 3.94,14.73 6.86,14.73
N$73  (via drill 0.4)
  Top 0.305: IC1.18 34.79,30.36 35.69,29.46 38.23,29.46 38.48,29.21 38.48,24.51 v38.23,24.26 38.48,24 38.48,23.45 37.51,22.48 35.56,22.48 v35.18,22.1 34.77,22.51 30.32,22.51 v29.97,22.86 29.85,22.98 28.64,22.98 28.19,22.54 28.19,21.72 28.59,21.32 IC6.5 | IC7.5 36.72,20.94 v36.45,21.21 | v40.13,24.13 R20.2 | v29.21,25.65 28.96,25.91 28.96,26.11 28.96,26.12 28.96,27.01 28.15,27.81 27.62,27.81 27.11,28.32 v26.92,28.32 | v17.4,27.94 16.51,27.94 16.13,28.32 IC3.8
  Bottom 0.305: v35.18,22.1 35.56,22.1 v36.45,21.21 | v38.23,24.26 40.01,24.26 v40.13,24.13 | v29.97,22.86 29.72,22.86 29.46,23.11 29.46,25.4 v29.21,25.65 | v26.92,28.32 26.54,27.94 v17.4,27.94
N$74
  Top 1.016: CON6.3 63.35,6.6 65.79,9.04 65.79,14.99 SW4.C2
  Bottom 1.016: SW4.C1 SW4.C2
N$77
  pour Top (no thermals): 26.29,18.54 27.56,18.54 27.56,15.49 28.7,15.49 28.7,14.1 26.29,14.1
N$79  (via drill 0.4)
  Top 0.305: IC1.19 35.29,30.62 35.94,29.97 38.73,29.97 38.99,29.72 38.99,29.59 | IC7.4 37.22,21.97 | 37.22,21.97 37.72,21.97 38.99,23.24 38.99,29.59 | 37.22,21.97 36.14,21.97 35.51,21.34 34.8,21.34 34.13,22 29.18,22 v28.96,22.23 29.09,22.09 IC6.4 | R19.2 38.99,29.59 | v28.7,24.77 28.7,25.09 28.45,25.34 28.45,25.91 28.45,26.8 27.94,27.3 v27.05,27.3 | v17.4,26.92 17.14,27.18 16.25,27.18 14.86,28.57 IC3.7
  Bottom 0.305: v28.96,22.23 28.96,24.51 v28.7,24.77 | v27.05,27.3 26.92,27.43 17.96,27.43 17.46,26.92 v17.4,26.92
N$80
  Top 1.016: R41.1 45.72,13.59 F2.2
N$81
  Top 1.016: CON5.5 28.83,8 R27.1
  pour Top (no thermals): 27.05,12.06 28.57,12.06 28.57,10.41 30.1,10.41 30.1,8.51 27.05,8.51
N$82
  Top 0.508: 65.79,28.96 IC10.3
  Top 1.016: SW4.L2- 68.45,25.15 65.79,27.81 65.79,28.96
N$85
  Top 0.813: CON5.10 14.5,8.13 17.14,8.13 17.4,8.38 R21.1
N$86
  Top 1.016: SW3.NO2 59.94,6.57 CON6.4
  Bottom 1.016: SW3.NO1 SW3.NO2
N$87
  Top 1.016: CON6.5 56.35,6.73 57.4,7.79 57.4,12.45 SW3.NC2
  Bottom 1.016: SW3.NC1 SW3.NC2
N$88
  Top 1.016: CON6.6 52.85,6.73 54.86,8.74 54.86,14.99 SW3.C2
  Bottom 1.016: SW3.C1 SW3.C2
N$90  (via drill 0.4)
  Top 0.305: IC1.38 34.79,40.76 34.92,40.89 34.92,42.42 v34.67,42.67 | v49.53,32.89 49.85,32.89 49.98,33.02 52.7,33.02 53.21,33.53 55.63,33.53 56.13,33.02 56.13,31.75 56.39,31.5 IC9.5
  Bottom 0.305: v34.67,42.67 34.93,42.41 34.93,41.26 36.05,40.13 36.35,40.13 38.63,37.85 39.84,37.85 42.12,35.56 44.16,35.56 46.06,33.65 48.64,33.65 49.4,32.89 v49.53,32.89
N$91  (via drill 0.4)
  Top 0.305: IC9.2 53.21,31.5 52.2,32.51 50.67,32.51 v50.42,32.26 | v33.78,43.18 33.78,42.42 34.29,41.91 IC1.39
  Bottom 0.305: v50.42,32.26 49.97,32.26 49.84,32.13 49.22,32.13 48.21,33.14 45.85,33.14 43.95,35.05 41.91,35.05 39.62,37.34 38.42,37.34 36.14,39.62 35.84,39.62 34.42,41.05 34.42,41.78 33.78,42.42 v33.78,43.18
UVCC  (via drill 0.4)
  Top 0.305: IC1.7 28.46,35.19 v28.32,35.05 | IC1.2 29.88,37.69 28.96,38.61 v28.32,38.61
  Top 0.508: C9.2 4.83,41.02
  Top 0.813: v28.45,46.23 v24.51,46.23 | v4.83,45.09 4.83,41.02 F1.2 | v21.34,46.23 10.29,46.23 9.65,45.59 v9.65,45.09
  Top 1.016: D1.2 4.83,37.02 F1.2
  Bottom 0.813: v9.65,45.09 v4.83,45.09 | v28.32,35.05 27.3,36.07 27.3,38.61 | v28.45,46.23 29.21,45.47 29.21,42.16 27.3,40.26 27.3,38.61 | v28.32,38.61 27.3,38.61 | v24.51,46.23 v21.34,46.23
VCC  (via drill 0.4, 0.6, 0.7)
  Top 0.305: IC1.24 39.08,33.69 v39.37,33.4 | v46.23,30.61 R35.1 | IC1.14 32.79,30.63 31.88,29.72 30.86,29.72 30.48,29.34 29.72,29.34 | IC1.44 31.79,39.84 v30.86,40.77 28.32,40.77 27.94,41.15 27.94,42.04 27.69,42.29 25.65,42.29 25.4,42.04 R4.2 | C33.2 38.35,43.18 | 38.35,43.18 v38.86,43.18 | IC7.2 38.22,21.07 v38.35,21.21 | v18.29,22.1 R22.1 | v23.37,22.1 R24.1 | R19.1 R20.1 40.89,26.67 41.15,26.42 41.15,22.23 | R43.1 41.15,15.11 40.89,15.37 40.89,21.97 40.64,22.23 | R3.1 27.3,29.34 | R25.1 19.18,24.89 18.92,24.64 v18.29,24.64 | R30.1 23.11,24.89 v23.37,24.64 | v19.68,38.99 19.74,38.99 20.7,38.03 R18.1 | IC1.34 36.79,39.71 38.35,41.27 38.35,43.18
  Top 0.508: LED1.2 LED1.4 | C2.2 C1.2 44.2,32.38 v44.45,32.13 45.72,32.13 46.23,31.62 v46.23,30.61 | v11.43,53.98 11.43,49.15
  Top 0.61: 29.72,29.34 27.3,29.34 25.78,29.34 | v33.53,21.08 34.12,21.08 34.92,20.27 R34.1 | CON1.2 24.89,29.34 25.78,29.34 | 26.57,24.64 26.57,26.41 25.78,27.2 25.78,29.34
  Top 0.762: C11.2 R7.1 | IC8.8 45.85,22.23 | v9.65,37.97 11.68,40.01 13.72,40.01 14.1,39.62 C19.2 C20.2 14.61,37.21 | IC3.2 14.86,36.96 14.61,37.21 | v15.11,37.21 14.61,37.21
  Top 0.813: R29.1 26.8,20.45 v27.43,21.08
  Top 1.016: v38.35,21.21 39.37,22.23 40.64,22.23 41.15,22.23 45.85,22.23 47.12,22.23 47.75,22.86 C30.2 C31.2 v47.75,26.67 48.77,26.67 49.78,27.69 SW3.L1+ SW3.L2+ 55.12,25.15 57.02,23.24 61.34,23.24 SW4.L2+ SW4.L1+ | v30.1,21.08 v33.53,21.08 | v14.48,24.64 v18.29,24.64 v23.37,24.64 26.57,24.64 v27.43,24.64
  Top 1.651: v37.34,46.74 C32.2
  Top 2.032: v6.6,42.8 6.6,46.86 8.89,49.15 11.43,49.15 v20.57,49.15 | v26.42,49.15 28.19,49.15 30.61,46.74 v31.24,46.74 C32.2
  Bottom 0.305: v18.29,24.64 v18.29,22.1 | v23.37,24.64 v23.37,22.1 | v19.68,38.99 19.63,38.99 19.12,38.48 17.06,38.48 15.79,37.21 v15.11,37.21
  Bottom 0.508: v11.43,53.98 11.43,56.71 LED1.4 | v31.24,46.74 31.11,46.61 31.11,41.02 v30.86,40.77 | v38.86,43.18 38.99,43.05 38.99,42.42 | v39.37,33.4 39.53,33.24 39.83,33.24 41.05,32.03 44.35,32.03 v44.45,32.13
  Bottom 0.762: v9.65,37.97 6.6,37.97
  Bottom 0.813: v46.23,30.61 46.23,28.19 v47.75,26.67
  Bottom 1.016: v11.43,18.03 10.03,19.43 v10.03,24.64 v14.48,24.64 | v33.53,21.08 34.49,21.08 35.48,20.09 37.24,20.09 v38.35,21.21 | v30.1,21.08 v27.43,21.08 v27.43,24.64
  Bottom 1.651: v37.34,46.74 38.23,46.74 38.99,45.97 38.99,42.42 40.01,41.4 CON2.3
  Bottom 2.032: v8.51,32.51 8.51,34.04 6.6,35.94 6.6,37.97 v6.6,42.8 | v26.42,49.15 v20.57,49.15
  pour Top (no thermals): 6.6,26.67 6.6,35.18 9.4,35.18 9.4,27.69 11.56,25.53 11.56,22.73 3.94,22.73 3.94,26.67
  pour Top (no thermals): 9.91,16.51 12.45,16.51 12.45,18.54 10.79,18.54 10.79,17.78 9.91,17.78
VEXT
  Top 0.813: CON5.12 4.51,7.82 D2.2
  pour Top (no thermals): 3.94,9.91 6.1,9.91 6.1,8.51 6.1,7.75 3.94,7.75